# Altium PCB PCB_final.PcbDoc
Units mm, origin at the board's own origin, x right, y up, seen from the top; angles counter-clockwise.
Board outline 78.99 x 42.16 mm, 2 copper layers (Top Layer, Bottom Layer); 12 components, 16 nets, 101 pads, 17 vias.
Unrouted connection lines stored in the file: 1.
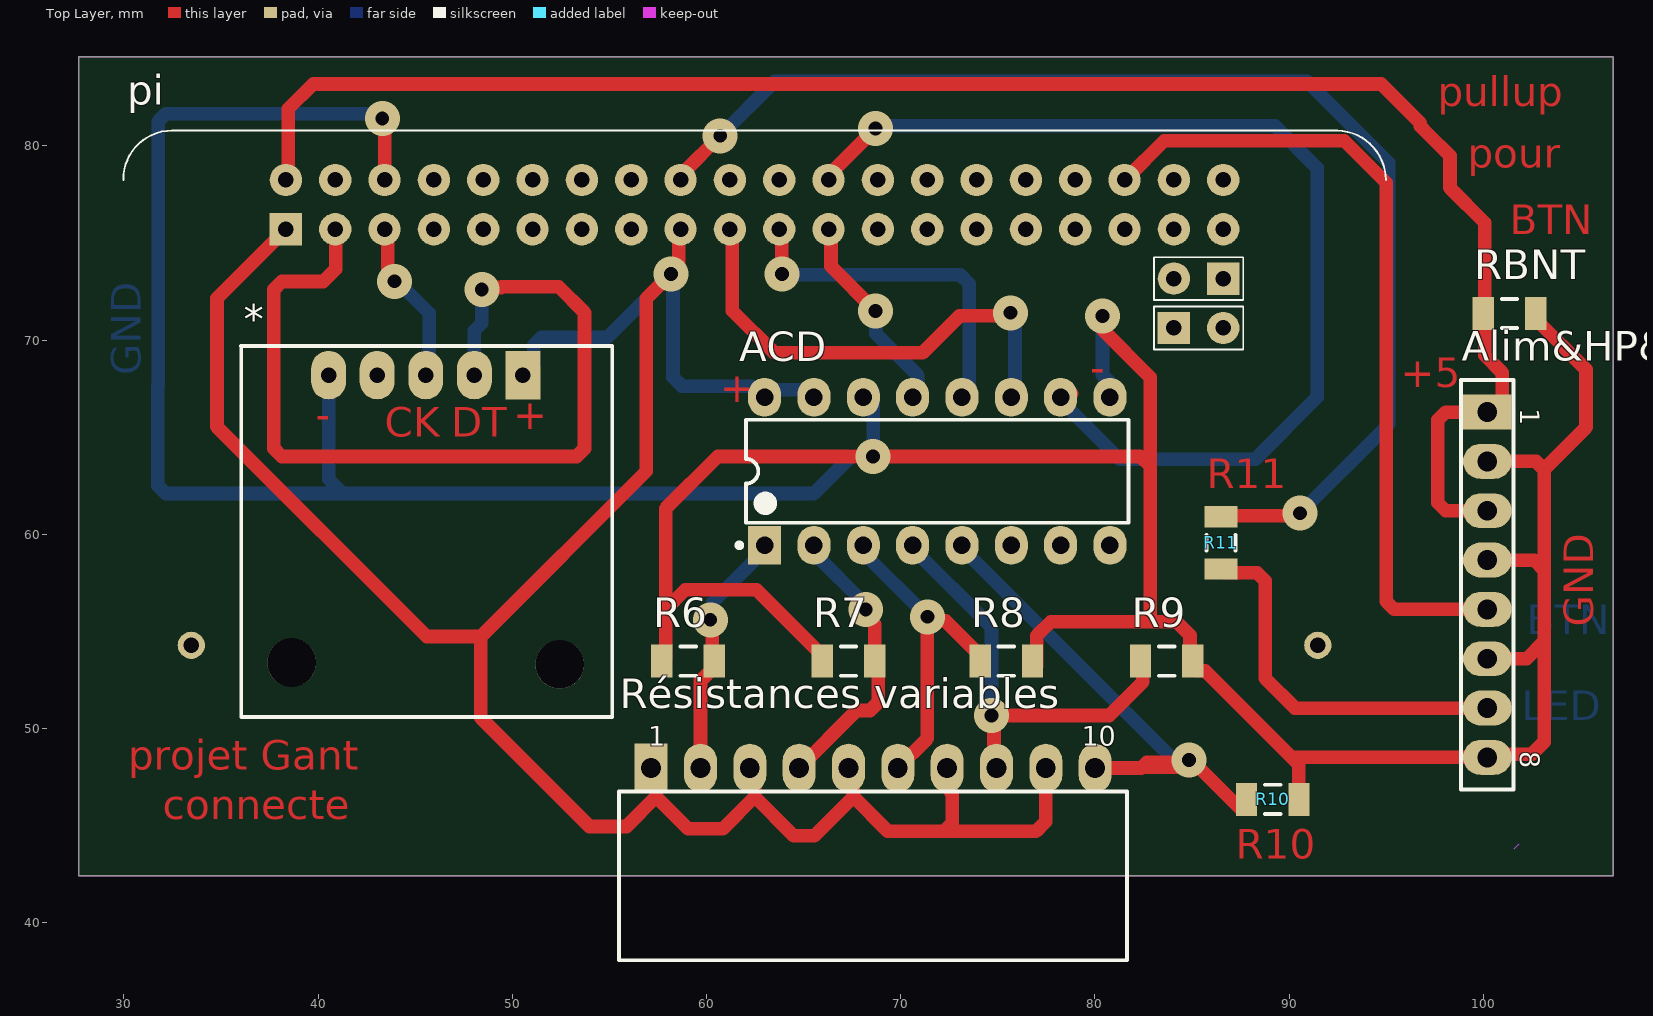
[diagram p0: Top Layer view]
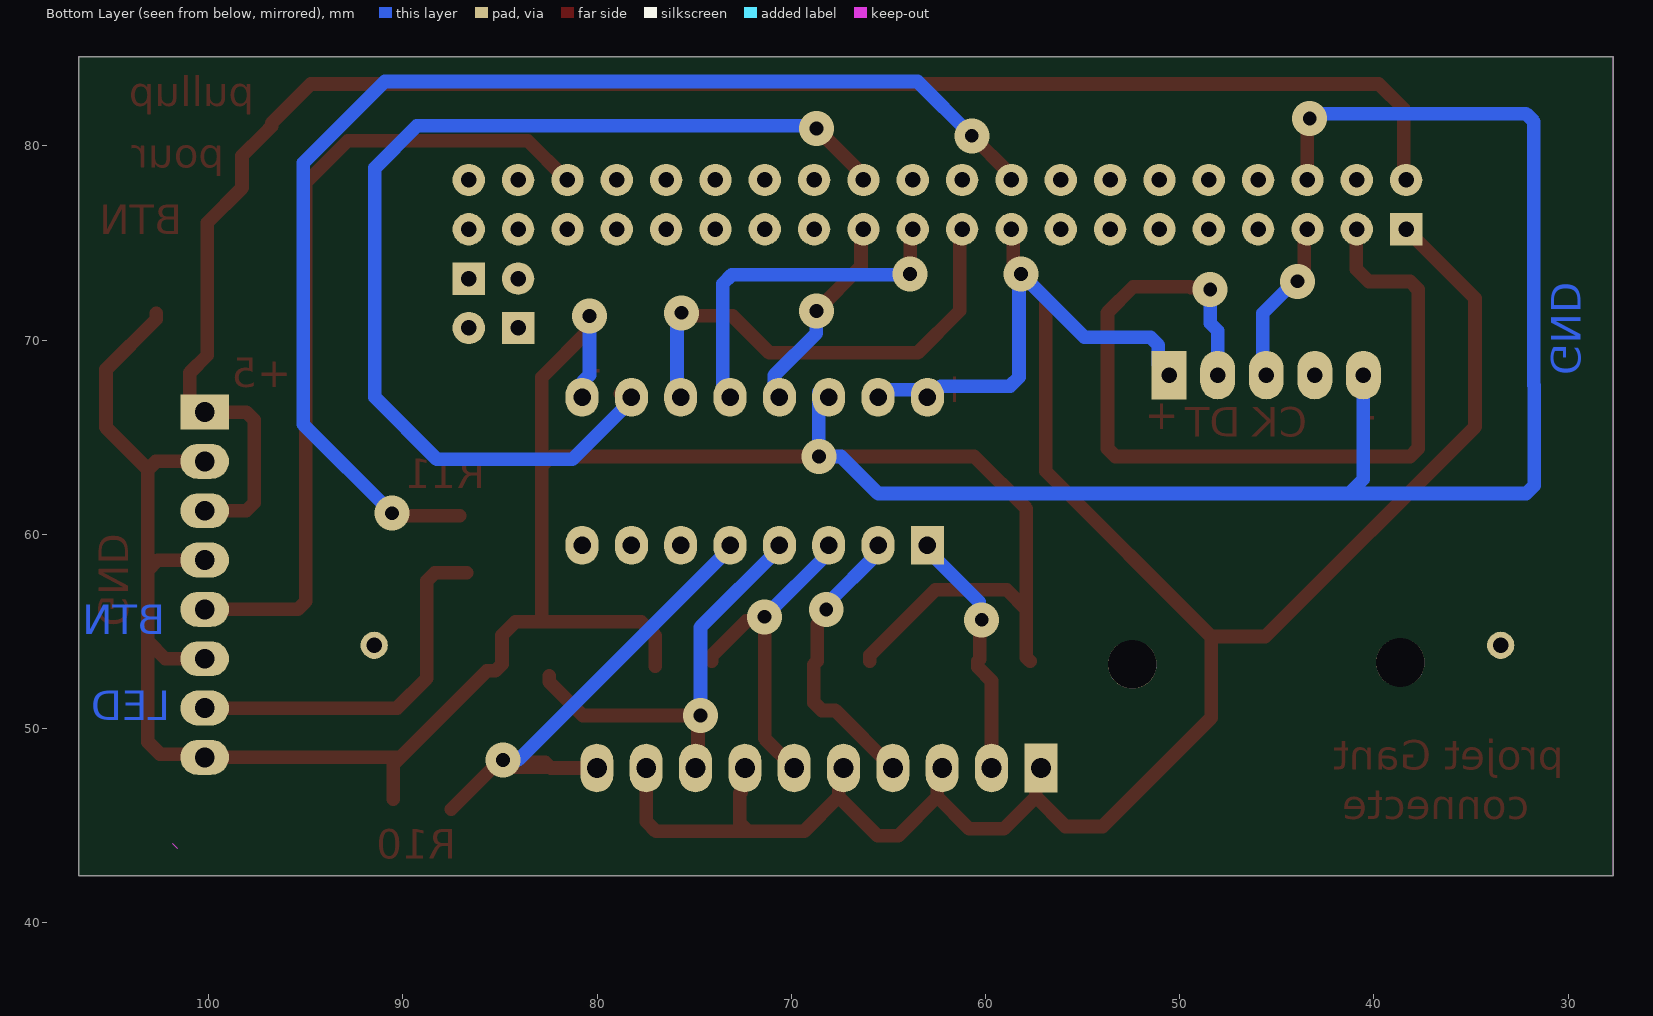
[diagram p1: Bottom Layer view, seen from below]

## Layer stack, top to bottom
Top Solder: solder mask 0.0102, Solder Resist, Dk 3.5
Top Layer: signal copper 0.0356
Dielectric 1: dielectric 0.32, FR-4, Dk 4.8
Bottom Layer: signal copper 0.0356
Bottom Solder: solder mask 0.0102, Solder Resist, Dk 3.5

## Board outline
27.686,42.418 27.686,84.582 106.68,84.582 106.68,42.418

## Design rules (kind name [scope] priority, off if disabled: settings)
Clearance [All] p1: gap=0.3 ignorepadtopadclearanceinfootprint=FALSE
ComponentClearance [All] p1 off: gap=0 collisioncheckmode=3 verticalgap=0 showdistances=FALSE
Height [All] p1 off: minheight=0 maxheight=25.4 prefheight=12.7
PolygonConnect [All] p1: connectstyle=Relief reliefconductorwidth=0.254 reliefentries=4 polygonreliefangle="90 Angle" airgapwidth=0.254
RoutingVias [All] p1: holewidth=0.711 width=1.8 viastyle="Through Hole" minholewidth=0.711 minwidth=1.8 maxholewidth=0.711 maxwidth=1.8
SolderMaskExpansion [All] p1: expansion=0.102 istentingtop=FALSE
Width [All] p1: maxlimit=0.7 minlimit=0.7 preferedwidth=0.7
28 further rules are at their usual default settings.

## Components (designator, comment, footprint, x,y, rotation, side; value= is the part's Value field where it differs from the comment)
* "ICM20948" ICM20948 50.546,68.199 r270 top
ACD "MCP3008-I/P" PDIP300-P16 71.882,63.246 r90 top
Alim&HP&Bouton&Led "61300811821" 61300811821 100.203,57.404 r270 top
pi "Raspberry_Pi_Zero_W__v1.3_" RASPBERRYPIZEROWV13 62.23,65.786 r0 top
R6 "" C1206 59.055,53.467 r0 top value=73,5K
R7 "" C1206 67.31,53.467 r0 top value=73,5K
R8 "" C1206 75.438,53.467 r180 top value=73,5K
R9 "" C1206 83.693,53.467 r180 top value=73,5K
R10 "" C1206 89.154,46.355 r180 top value=73,5K
R11 "" C1206 86.487,59.563 r90 top value=500
RBNT "" C1206 101.346,71.374 r180 top value=10K
"Résistances variables" "613010143121" 613010143121 68.58,42.418 r0 top

## Footprints (in the part's own frame and the unit in brackets; to place one, negate y for a bottom-side part, rotate by r counter-clockwise, add the part's x,y. Pads: shape width x height; smd on the part's side, far side on the other; paste and mask are expansions set on the pad)
61300811821 [mm] "Socket Header, Pitch 2.54 mm, THT, Vertical, single row, 8p"
  rect 1.8x2.5 hole 1.02: 1(-8.89,0)
  oval 1.8x2.5 hole 1.02: 2(-6.35,0) 3(-3.81,0) 4(-1.27,0) 5(1.27,0) 6(3.81,0) 7(6.35,0) 8(8.89,0)
  silkscreen extent -10.54,-1.35 10.54,1.35, body extent -10.41,-1.25 10.41,1.25, height 8.55
613010143121 [mm] "Socket Header, Pitch 2.54 mm, THT, Angled, single row, 10p"
  rect 1.7x2.5 hole 1.02: 1(-11.43,5.55)
  oval 1.7x2.5 hole 1.02: 2(-8.89,5.55) 3(-6.35,5.55) 4(-3.81,5.55) 5(-1.27,5.55) 6(1.27,5.55) 7(3.81,5.55) 8(6.35,5.55) 9(8.89,5.55) 10(11.43,5.55)
  silkscreen extent -13.08,-4.35 13.08,4.35, body extent -12.95,-4.25 12.95,5.75, height 2.55
C1206 [mm] "Chip Capacitor, Body 3.2x1.6mm, IPC High Density"
  rect 1.1x1.7 smd: 1(-1.35,0) 2(1.35,0)
  silkscreen extent -0.4,-0.75 0.4,0.75, body extent -1.7,-0.9 1.7,0.9, height 1.3
ICM20948 [mm]
  rect 2.5x1.8 hole 0.8: 1(0,0)
  oval 2.5x1.8 hole 0.8: 2(0,-2.5) 3(0,-5) 4(0,-7.5) 5(0,-10)
  round 2.5 hole 2.5: 5(14.9,1.9) 6(14.8,-11.9)
  silkscreen extent -1.5,-14.53 17.6,4.6
PDIP300-P16 [mm] "DIP, 16-Leads, Row Spacing 7.62mm, Pitch 2.54mm, Body 19.2x6.6mm"
  rect 2x1.7 hole 0.9: 1(-3.81,8.89)
  oval 2x1.7 hole 0.9: 2(-3.81,6.35) 3(-3.81,3.81) 4(-3.81,1.27) 5(-3.81,-1.27) 6(-3.81,-3.81) 7(-3.81,-6.35) 8(-3.81,-8.89) 9(3.81,-8.89) 10(3.81,-6.35) 11(3.81,-3.81) 12(3.81,-1.27) 13(3.81,1.27) 14(3.81,3.81) 15(3.81,6.35) 16(3.81,8.89)
  silkscreen extent -3.93,-9.85 2.65,10.31, body extent -3.55,-9.85 3.55,9.85, height 5.34
RASPBERRYPIZEROWV13 [mm]
  rect 1.665x1.665 hole 0.8: 1(-23.885,9.92) 41(24.375,7.38) 43(21.835,4.84)
  round 1.665 hole 0.8: 2(-23.885,12.46) 3(-21.345,9.92) 4(-21.345,12.46) 5(-18.805,9.92) 6(-18.805,12.46) 7(-16.265,9.92) 8(-16.265,12.46) 9(-13.725,9.92) 10(-13.725,12.46) 11(-11.185,9.92) 12(-11.185,12.46) 13(-8.645,9.92) 14(-8.645,12.46) 15(-6.105,9.92) 16(-6.105,12.46) 17(-3.565,9.92) 18(-3.565,12.46) 19(-1.025,9.92) 20(-1.025,12.46) 21(1.515,9.92) 22(1.515,12.46) 23(4.055,9.92) 24(4.055,12.46) 25(6.595,9.92) 26(6.595,12.46) 27(9.135,9.92) 28(9.135,12.46) 29(11.675,9.92) 30(11.675,12.46) 31(14.215,9.92) 32(14.215,12.46) 33(16.755,9.92) 34(16.755,12.46) 35(19.295,9.92) 36(19.295,12.46) 37(21.835,9.92) 38(21.835,12.46) 39(24.375,9.92) 40(24.375,12.46) 42(21.835,7.38) 44(24.375,4.84)
  round 1.4 hole 0.8 unplated: MH2(-28.755,-11.5) MH3(29.245,-11.5)
  silkscreen extent -32.26,3.74 32.74,15

## Part data
ACD: library part CMP-0188-00184-2, "2.7V 4-Channel/8-Channel 10-Bit A/D Converters with SPI Serial Interface, 16-Pin PDIP, Industrial Temperature", Code_JEDEC=MS-001-BB, ComponentLink1Description="Manufacturer URL", ComponentLink1URL=http://www.microchip.com/, ComponentLink2Description=Datasheet, ComponentLink2URL=http://ww1.microchip.com/downloads/en/DeviceDoc/21295d.pdf, ComponentLink3Description="Package Specification", ComponentLink3URL=http://www.microchip.com/stellent/groups/techpub_sg/documents/packagingspec/en012702.pdf, DatasheetVersion="revD, Dec-2008", PackageDescription="16-Lead Plastic Dual In-Line (P) - 300 mil Body [PDIP]", PackageReference=PDIP300-P16, PackageVersion="revBB, Aug-2009", RevisionNote="URLs added."
Alim&HP&Bouton&Led: library part CMP-1502-01327-1, "THT Vertical Socket Header WR-PHD, Pitch 2.54 mm, Single Row, 8 pins", Contact Resistance=20mOhm, Manufacturer="Wurth Elektronik", Operating Temperature=-40to125degC, Rated Current=3A, Withstanding Voltage=500VAC, Working Voltage=250VAC, Datasheet URL=https://katalog.we-online.de/em/datasheet/6130xx11821.pdf, Gender=Female, Manufacturer URL=http://www.we-online.de, Mounting Technology=THT, Orientation=Vertical, Package Reference=61300811821, Packaging=Tray, Part Number=61300811821, Pin Number=8, Pitch=2.54mm, Publisher=WurthElektronik, Row Number=Single
pi: "Integrated Circuit", Manufacturer_Name=RASPBERRY-PI, Manufacturer_Part_Number="Raspberry Pi Zero W (v1.3)", Datasheet Link=https://cdn.sparkfun.com/assets/learn_tutorials/6/7/6/PiZero_1.pdf
R6 R7 R8 R9 R10 R11 RBNT: library part Res1, "Resistor", LatestRevisionDate=17-Jul-2002, LatestRevisionNote="Re-released for DXP Platform.", PackageDescription="Axial Device, Thru-Hole; 2 Leads; 0.3 in Pin Spacing", PackageReference=AXIAL-0.3, Published=8-Jun-2000, Publisher="Altium Limited"
"Résistances variables": library part CMP-1502-01419-1, "THT Angled Socket Header WR-PHD, Pitch 2.54 mm, Single Row, 10 pins", Contact Resistance=20mOhm, Manufacturer="Wurth Elektronik", Operating Temperature=-40to125degC, Rated Current=3A, Withstanding Voltage=500VAC, Working Voltage=250VAC, Datasheet URL=https://katalog.we-online.de/em/datasheet/6130xx143121.pdf, Gender=Female, Manufacturer URL=http://www.we-online.de, Mounting Technology=THT, Orientation=Angled, Package Reference=613010143121, Packaging=Tray, Part Number=613010143121, Pin Number=10, Pitch=2.54mm, Publisher=WurthElektronik, Row Number=Single

## Via types
v1: diameter 1.8, hole 0.711, Top Layer to Bottom Layer, 17 vias

## Nets (pads, with @x,y where several pads share a name; then routed paths per layer and width w, separated by ;. In a path a pad name is that pad's centre, name@x,y a point inside that pad or via, vN(x,y) a via of type N, cw(c..) or ccw(c..) an arc to the next point about the centre after c; other vN are vias at no path point)
bouton: Alim&HP&Bouton&Led.1 Alim&HP&Bouton&Led.3 Alim&HP&Bouton&Led.5 pi.2 pi.36 RBNT.2 | length 132.2
  Top Layer w0.7: pi.2@38.472,78.246 38.472,81.906 39.751,83.185 94.742,83.185 96.759,81.168 96.759,81.011 97.14,80.63 98.283,79.487 98.283,77.836 100.076,76.043 100.076,71.12 100.076,69.215 100.965,68.326 Alim&HP&Bouton&Led.1@100.965,65.786 ; pi.36@81.652,78.246 81.652,78.346 83.57,80.264 92.837,80.264 94.996,78.105 94.996,56.544 95.406,56.134 Alim&HP&Bouton&Led.5 ; Alim&HP&Bouton&Led.3 98.057,61.214 97.647,61.624 97.647,65.884 98.057,66.294 Alim&HP&Bouton&Led.1
GND: *.5@40.546,68.199 ACD.9 ACD.14 Alim&HP&Bouton&Led.2 Alim&HP&Bouton&Led.4 Alim&HP&Bouton&Led.6 Alim&HP&Bouton&Led.8 pi.6 R6.1 R7.1 R8.1 R9.1 R10.1 RBNT.1 | length 214.4
  Top Layer w0.7: pi.6 v1@43.425,81.162 ; R6.1 57.896,53.658 57.896,56.134 ; R7.1 65.96,53.767 62.577,57.15 58.912,57.15 57.896,56.134 ; R8.1@77.009,53.213 77.009,54.784 77.724,55.499 82.851,55.499 ; v1(80.391,71.247) 80.391,70.54 82.851,68.08 82.851,63.5 ; R10.1 90.504,48.146 90.136,48.514 ; Alim&HP&Bouton&Led.6 102.235,53.594 103.124,54.483 ; Alim&HP&Bouton&Led.4 102.616,58.674 103.124,58.166 ; Alim&HP&Bouton&Led.2 102.714,63.754 103.124,63.344 ; RBNT.1 102.696,71.074 105.283,68.487 105.283,65.503 103.124,63.344 ; 57.896,56.134 57.896,61.325 60.579,64.008 v1(68.58,64.008) 82.343,64.008 82.851,63.5 ; 82.851,55.499 82.851,63.5 ; 82.851,55.499 84.201,55.499 84.896,54.804 84.896,53.314 85.243,52.967 85.683,52.967 90.136,48.514 ; 90.136,48.514 Alim&HP&Bouton&Led.8 100.373,48.684 102.503,48.684 103.124,49.305 103.124,54.483 ; 103.124,54.483 103.124,58.166 ; 103.124,58.166 103.124,63.344
  Bottom Layer w0.7: *.5@40.546,68.199 40.546,62.832 41.275,62.103 ; v1(43.307,81.407) 43.269,81.407 43.015,81.661 32.175,81.661 31.765,81.251 31.765,67.676 31.75,67.661 31.75,62.513 32.16,62.103 41.275,62.103 ; ACD.14@68.453,67.437 68.58,67.31 v1(68.58,64.008) 67.437,64.008 65.532,62.103 41.275,62.103 ; v1(80.391,71.247) 80.391,68.199 ACD.9@81.153,67.437
LED: Alim&HP&Bouton&Led.7 R11.1 | length 19.3
  Top Layer w0.7: R11.1@86.718,58.013 88.359,58.013 88.769,57.603 88.769,52.582 90.297,51.054 Alim&HP&Bouton&Led.7
NetACD_1: "Résistances variables.2" ACD.1 R6.2 | length 12.8
  Top Layer w0.7: 59.69,47.968 59.69,52.452 60.405,53.167 R6.2 60.302,53.571 60.302,55.496 v1(60.198,55.6)
  Bottom Layer w0.7: v1(60.198,55.6) 60.325,55.727 60.325,56.515 ACD.1@62.992,59.182
NetACD_2: "Résistances variables.4" ACD.2 R7.2 | length 15.3
  Top Layer w0.7: 64.77,47.968 67.729,50.927 68.424,50.927 68.834,51.337 68.834,53.293 R7.2 68.66,55.375 68.199,55.836 v1(68.199,56.134)
  Bottom Layer w0.7: ACD.2 65.532,59.043 68.199,56.376 v1(68.199,56.134) v1@67.945,56.388
NetACD_3: "Résistances variables.6" ACD.3 R8.2 | length 16.9
  Top Layer w0.7: 69.85,47.968 71.374,49.492 v1(71.374,55.753) 71.584,55.543 72.312,55.543 74.088,53.767 R8.2
  Bottom Layer w0.7: ACD.3@68.072,59.055 v1(71.374,55.753)
NetACD_4: "Résistances variables.8" ACD.4 R9.2 | length 22.1
  Top Layer w0.7: 74.93,47.968 74.803,48.095 74.803,50.546 v1(74.676,50.673) 80.738,50.673 82.47,52.405 R9.2@82.47,52.705
  Bottom Layer w0.7: ACD.4 70.612,59.286 74.676,55.222 v1(74.676,50.673)
NetACD_5: "Résistances variables.10" ACD.5 R10.2 | length 27.3
  Top Layer w0.7: 80.01,47.968 82.375,47.968 82.413,48.006 ; v1(84.836,48.387) 84.709,48.26 82.667,48.26 82.413,48.006 ; R10.2@87.503,45.847 85.344,48.006 82.413,48.006
  Bottom Layer w0.7: ACD.5 73.152,59.286 84.051,48.387 v1(84.836,48.387)
NetACD_10: ACD.10 pi.24 | length 55.7
  Top Layer w0.7: pi.24 66.285,78.477 v1(68.707,80.899) ; ACD.10@78.613,67.287 78.613,67.437 ACD.10@78.804,67.246
  Bottom Layer w0.7: v1(68.707,80.899) 68.834,81.026 89.281,81.026 91.44,78.867 91.44,67.056 88.242,63.858 81.28,63.858 78.232,66.906 ACD.10 ; ACD.10@78.613,67.287 ACD.10@78.613,67.437
NetACD_11: ACD.11 pi.19 | length 23.9
  Top Layer w0.7: pi.19@61.332,75.706 61.332,71.51 63.5,69.342 71.12,69.342 73.025,71.247 v1@75.184,71.247
  Bottom Layer w0.7: v1(75.661,71.405) 75.883,71.183 75.883,67.627 ACD.11@76.073,67.437
NetACD_12: ACD.12 pi.21 | length 17.6
  Top Layer w0.7: pi.21@63.872,75.706 63.881,75.697 v1(63.881,73.406)
  Bottom Layer w0.7: v1(63.881,73.406) 63.931,73.356 73.075,73.356 73.533,72.898 ACD.12@73.533,67.437
NetACD_13: ACD.13 pi.23 | length 10.2
  Top Layer w0.7: pi.23@66.412,75.706 66.412,73.796 v1(68.707,71.501)
  Bottom Layer w0.7: v1(68.707,71.501) 68.707,70.358 70.866,68.199 70.866,67.564 ACD.13@70.993,67.437
Netpi_18: pi.18 R11.2 | length 63.8
  Top Layer w0.7: pi.18@58.792,78.246 58.792,78.604 v1(60.706,80.518) ; R11.2@87.078,60.96 90.424,60.96 v1(90.551,61.087)
  Bottom Layer w0.7: v1(60.706,80.518) 63.5,83.312 90.932,83.312 95.123,79.121 95.123,65.659 v1(90.551,61.087)
SCL: *.3 pi.5 | length 8.6
  Top Layer w0.7: pi.5@43.552,75.706 43.59,75.668 43.59,73.531 43.942,73.179 v1(43.942,73.025)
  Bottom Layer w0.7: v1(43.942,73.025) 44.084,73.025 45.722,71.387 45.722,68.375 *.3
SDA: *.2 pi.3 | length 47.5
  Top Layer w0.7: pi.3@40.911,75.605 40.911,73.656 40.272,73.017 38.137,73.017 37.727,72.607 37.727,64.418 38.137,64.008 53.311,64.008 53.721,64.418 53.721,71.415 52.391,72.745 49.473,72.745 49.436,72.708 48.541,72.708 v1(48.432,72.599)
  Bottom Layer w0.7: *.2 48.046,70.48 48.432,70.866 v1(48.432,72.599)
VCC: "Résistances variables.1" "Résistances variables.3" "Résistances variables.5" "Résistances variables.7" "Résistances variables.9" *.1 ACD.15 ACD.16 pi.1 | length 127.9
  Top Layer w0.7: pi.1 34.798,72.159 34.798,65.532 45.593,54.737 48.387,54.737 ; 48.387,50.546 53.975,44.958 55.88,44.958 57.404,46.482 ; 48.387,50.567 48.387,54.737 ; 57.404,47.752 57.404,46.482 ; v1(58.166,73.406) 56.896,72.136 56.896,63.246 48.387,54.737 ; v1@58.582,73.976 58.582,75.496 58.792,75.706 ; 62.484,47.752 62.484,46.482 ; 67.564,47.752 67.564,46.482 ; 72.581,47.689 72.581,46.721 72.644,46.658 72.644,45.114 72.234,44.704 ; 77.47,47.968 77.47,45.212 76.962,44.704 72.234,44.704 ; 57.404,46.482 59.055,44.831 60.833,44.831 62.484,46.482 ; 62.484,46.482 64.496,44.47 65.552,44.47 67.564,46.482 ; 67.564,46.482 69.342,44.704 72.234,44.704
  Bottom Layer w0.7: *.1 51.096,68.749 51.096,69.735 51.506,70.145 54.905,70.145 v1(58.166,73.406) 58.275,73.297 58.275,68.09 58.734,67.631 62.296,67.631 62.871,67.056 ACD.16 ; ACD.16@63.032,67.437 ACD.15@65.913,67.437
pads on no net: *.4 *.5@52.446,53.299 *.6 ACD.6 ACD.7 ACD.8 pi.4 pi.7 pi.8 pi.9 pi.10 pi.11 pi.12 pi.13 pi.14 pi.15 pi.16 pi.17 pi.20 pi.22 pi.25 pi.26 pi.27 pi.28 pi.29 pi.30 pi.31 pi.32 pi.33 pi.34 pi.35 pi.37 pi.38 pi.39 pi.40 pi.41 pi.42 pi.43 pi.44 pi.MH2 pi.MH3

## Keep-outs
Keep-Out Layer:
  lines w0.01: 27.686,44.958 27.686,83.058 ; 101.6,43.815 101.854,44.069 ; 27.686,42.418 106.68,42.418 106.68,84.582 27.686,84.582 27.686,42.418

## Other copper
Top Layer:
  text "pullup" at 97.663,82.042 h1.52
  text "pour" at 99.187,78.867 h1.52
  text "BTN" at 101.346,75.438 h1.52
  text "-" at 79.756,67.818 h1.52
  text "+5" at 95.758,67.564 h1.52
  text "+" at 60.706,66.802 h1.52
  text "-" at 39.878,65.405 h1.52
  text "+" at 50.038,65.405 h1.52
  text "CK" at 43.434,65.024 h1.52
  text "DT" at 46.863,65.024 h1.52
  text "GND" at 105.664,55.245 h1.52 r90
  text "projet Gant" at 30.226,47.879 h1.52
  text "connecte" at 32.004,45.339 h1.52
Bottom Layer:
  text "GND" at 30.861,68.199 h1.52 r90
  text "BTN" at 102.235,54.864 h1.52
  text "LED" at 101.981,50.419 h1.52

## Silkscreen, mask and mechanical layers (free items; w line width, h text height)
Mechanical 1:
  lines w0.254: 27.559,92.456 27.686,92.329 ; 102.489,125.095 103.378,124.206 ; 27.686,42.418 27.686,84.582 106.68,84.582 106.68,42.418 27.686,42.418

## Text inside footprints (layer, text, board x,y; h text height)
Alim&HP&Bouton&Led: Top Overlay "1" at 101.903,66.484 h1.02 r270; Top Overlay "8" at 101.903,48.824 h1.02 r270
"Résistances variables": Top Overlay "1" at 56.99,49.118 h1.02; Top Overlay "10" at 79.33,49.118 h1.02